# Altium PCB Sensorbox_Hub_ESP32.PCBDOC (part 2 of 3)
Units mil, origin at the board's own origin, x right, y up, seen from the top; angles counter-clockwise.
Board outline 895.86 x 2876.17 mil, 2 copper layers (Top, Bot), stack 61.855 mil thick; 68 components, 62 nets, 284 pads, 203 vias.
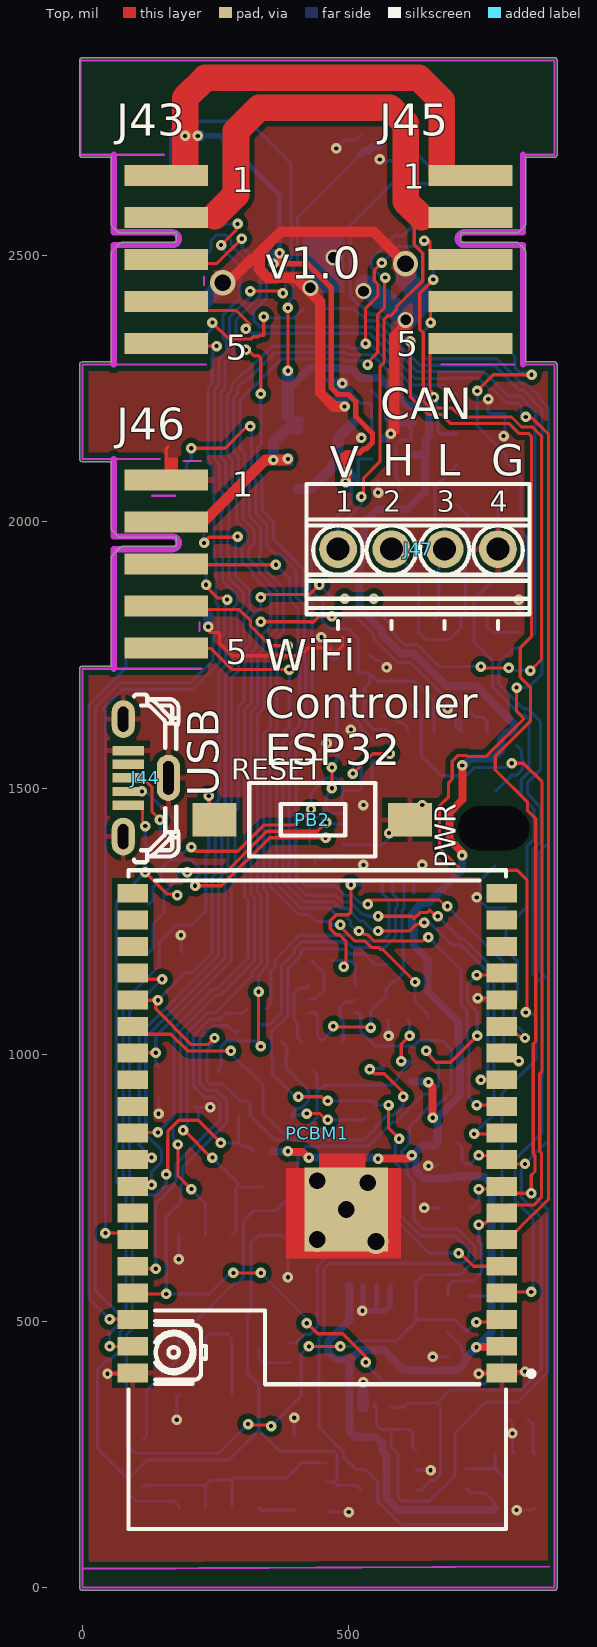
[diagram p0: Top view]

## Via types
v1: diameter 19.68, hole 7.87, Top to Bot, tented both sides, 192 vias
v2: diameter 47.24, hole 31.5, Top to Bot, tented both sides, 7 vias
v3: diameter 30, hole 20, Top to Bot, tented both sides, 4 vias

## Nets (pads, with @x,y where several pads share a name; then routed paths per layer and width w, separated by ;. In a path a pad name is that pad's centre, name@x,y a point inside that pad or via, vN(x,y) a via of type N, cw(c..) or ccw(c..) an arc to the next point about the centre after c; other vN are vias at no path point) (continued)
EMAC_TXDEN: (continued)
  Top w6: v1(43.31,665.35) 82.28,665.35 PCBM1.33@94.49,653.15 ; v1(232.28,1881.89) 229.27,1881.89 254.21,1856.95 269.03,1856.95 v1(271.65,1854.33)
  Bot w6: v1(43.31,665.35) 43.31,1645.71 39.37,1649.65 75.62,1685.9 207.72,1685.9 257.22,1735.4 257.22,1780.31 267.22,1790.31 267.22,1839.58 269.03,1841.39 269.03,1851.71 v1(271.65,1854.33) ; J46.8@157.48,1921.26 211.66,1921.26 232.28,1900.64 v1(232.28,1881.89)
ESP_EN: PB2.1 PCBM1.3 R119.2 T5.6 | length 3231.3
  Top w6: v1(237.23,1485.69) 237.23,1475.37 260.83,1451.77 PB2.1@260.83,1430.12 ; v1(311.02,307.09) 312.99,305.12 352.36,305.12 v1(354.33,303.15) ; v1(425.19,452.75) v1(484.25,452.76) ; v1(739.57,498.42) 782.68,498.42 PCBM1.3@787.4,503.15
  Bot w6: v1(237.23,1485.69) 237.23,1378.84 231.53,1373.13 231.53,1269.98 204.8,1243.25 177.23,1243.25 144.83,1210.84 144.83,1167.53 76.33,1099.04 76.33,765.88 94.02,748.18 94.02,486.19 82.95,475.12 82.95,270.07 101.39,251.63 255.57,251.63 v1(311.02,307.09) ; v1(354.33,303.15) 410.97,359.79 410.97,438.53 v1(425.19,452.75) ; v1(484.25,452.76) 505.21,452.76 515.19,462.73 588.72,462.73 629.13,503.15 ; T5.6@511.81,1078.74 517.62,1078.74 522.5,1073.87 522.5,1043.38 549.28,1016.59 621.98,1016.59 631.66,1026.27 676.85,1026.27 692.45,1010.67 692.45,931.07 663.7,902.33 651.27,902.33 613.33,864.39 613.33,832.89 599.27,818.83 599.27,802.18 609.76,791.68 609.76,774.83 622.89,761.71 622.89,689.55 639.85,672.59 704.62,672.59 736.84,640.37 736.84,614.82 709.45,587.43 641.05,587.43 625.62,572 625.62,506.66 629.13,503.15 ; v1(739.57,498.42) 722.24,481.1 R119.2@722.24,480.31 699.41,503.15 629.13,503.15
GND: C5.2 C6.1 C7.2 C8.1 C96.1 C97.1 C98.2 C100.2 C101.1 C102.1 C103.1 C104.1 D17.2 D18.2 D19.2 D22.2 D23.2 D24.1 D27.3 D40.3 IC16.2 IC16.3 IC16.4 IC16.7 IC25.5 IC25.7 IC26.3 IC26.29 IC28.2 IC30.2 IC31.2 IC31.4 IC32.3 IC54.5 IC55.1 J43.9 J44.5 J44.6 J45.9 J46.1 J46.9 J47.4 LD9.1 PB2.2 PCBM1.1 PCBM1.15 PCBM1.38 PCBM1.39 R108.1 R117.1 T25.2 | length 3988.2
  Top w6: v1(47.24,401.57) 92.91,401.57 PCBM1.38@94.49,403.15 ; J46.1@157.48,2078.74 157.48,2137.8 161.42,2141.73 ; 238.79,1792.46 257.31,1792.46 257.31,1773.35 281.78,1748.87 409.38,1748.87 424.29,1763.78 460.63,1763.78 472.44,1751.97 488.19,1767.72 488.19,1783.46 ; v1(741.87,1106.3) 784.25,1106.3 PCBM1.15@787.4,1103.15 ; v1(744.09,401.57) 785.83,401.57 PCBM1.1@787.4,403.15 789.76,405.51 v1(830.71,405.51)
  Top w20: v2(263.5,2448.81) 273.01,2448.81 316.36,2492.17 320.06,2492.17 332.42,2504.53 ; v1(492.12,2216.53) 472.32,2216.53 446.35,2242.51 446.35,2412.76 400.7,2458.4 347.56,2458.4 332.42,2473.54 332.42,2504.53 ; v1(578.74,2165.35) 585.27,2171.89 585.27,2347.87 606.88,2369.48 v3(606.88,2379.2) ; v2(606.3,2484.25) 546.26,2544.29 372.18,2544.29 332.42,2504.53
  Bot w5: v1(143.17,889.25) D18.2@143.17,921.85 ; v1(740.16,1295.27) 759.97,1275.46 D17.2@795.25,1275.46
  Bot w6: v1(177.17,314.96) 177.17,358.46 IC55.1@180.91,362.2 ; IC54.5@180.91,661.42 181.1,661.22 v1(181.1,616.14) ; v1(185.04,1224.41) 185.04,1196.85 D24.1@190.94,1190.94 ; T25.2@218.5,883.86 218.5,893.3 210.23,901.57 v1(240.16,901.57) ; v1(385.83,582.68) C5.2@385.83,616.14 ; C6.1@397.64,283.46 v1(397.64,318.9) ; C100.2@429.13,1555.12 430.12,1555.12 458.66,1583.66 v1(458.66,1584.65) ; C98.2@456.69,2267.72 464.57,2259.84 v1(488.19,2259.84) ; C8.1@462.2,145.28 465.75,141.73 v1(500,141.73) ; v1(476.38,2700.79) 492.76,2717.17 514.42,2717.17 C101.1@523.62,2726.38 ; IC26.3@488.19,1393.7 562.99,1393.7 IC26.29@582.68,1413.39 ; v1(492.12,2216.53) 496.7,2221.11 496.7,2239.61 R108.1@505.12,2248.03 ; v1(503.94,1610.23) 503.94,1592.52 C7.2@507.87,1588.58 ; R108.1@505.12,2244.09 505.12,2240.13 522.81,2222.44 539.37,2222.44 542.46,2219.35 IC25.5@542.46,2197.69 ; C103.1@539.37,1750 548.57,1740.8 557,1740.8 v1(570.94,1726.86) ; IC25.7@543.31,2157.48 IC25.5@543.31,2196.85 ; C97.1@553.15,2078.74 555.12,2076.77 v1(555.12,2055.12) ; v1(558.04,2680.08) 560.36,2677.76 587.65,2677.76 594.49,2670.92 D19.2@594.49,2666 ; IC32.3@572.84,1066.93 574.8,1064.97 v1(574.8,1035.43) ; IC30.2@625.98,220.47 v1(653.54,220.47) ; v1(641.73,712.6) D22.2@672.24,712.6 ; v1(649.6,791.34) 664.37,791.34 D23.2@668.31,795.27 ; v1(657.48,433.07) C102.1@686.02,433.07 ; J45.9@660.49,2413.38 J45.9@728.35,2413.38 ; v1@682.81,1652.22 v1(685.43,1649.61) IC28.2@701.57,1633.47 ; v1(740.16,1295.27) 740.16,1298.98 747.09,1305.91 747.09,1327.8 773.62,1354.33 LD9.1@775.59,1354.33 ; v1(761.84,2230.45) 761.84,2206.82 765.78,2202.89 D40.3@793.31,2202.89 793.31,2163.7 v1(790.5,2160.89) ; J47.4@779.92,1948.82 779.92,2049.61 D27.3@793.31,2062.99 ; C104.1@801.18,314.96 807.09,309.06 v1(807.09,289.37) 811.02,285.43 809.47,285.43 807.09,283.05 807.09,255.91 IC31.2@811.02,251.97 ; v1(814.96,145.67) 844.49,145.67 IC31.4@848.43,149.61 ; R117.1@818.9,1829.53 v1(818.9,1854.33) ; IC28.2@701.57,1633.47 710.04,1625 IC28.2@710.04,1606.3 701.57,1614.77 IC28.2@701.57,1633.47
  Bot w10: IC16.2@526.57,566.93 526.57,520.75 v1(525.51,519.68) 547.72,519.68 ; IC16.3@552.17,566.93 552.17,524.13 547.72,519.68 ; IC16.4@577.76,566.93 577.76,527.51 569.93,519.68 547.72,519.68
  Bot w20: J46.9@157.48,1842.52 217.37,1842.52 224.41,1835.48 236.22,1823.67 v1(236.22,1803.15) ; v1(448.82,1783.46) 448.82,1772.8 C96.1@472.44,1749.18 ; IC16.7@526.57,338.58 526.57,385.1 v1(527.3,385.83)
  Bot w30: J43.9@157.48,2413.39 228.45,2413.39 263.5,2448.43 v2(263.5,2448.81)
  Bot w40: v3@531.69,2444.61 557.82,2418.48 567.6,2418.48 v3(606.88,2379.2) 623.61,2395.92 623.61,2427.94 629.12,2433.45 649.19,2413.38 J45.9@660.49,2413.38 ; v2(606.3,2484.25) 607.69,2482.87 607.69,2454.88 623.61,2438.96 623.61,2434.37
  other v1: 527.56,1356.3 637.8,1356.3 575.63,1416.13 527.56,1468.5 637.8,1468.5 523.62,2157.48
  other v2: 551.18,649.61 440.94,653.54 495.28,709.84 535.43,759.84 440.94,763.78
  other v3: 527.56,2433.07 427.89,2439.16 470.96,2496.06